# EAGLE board expansion_board_vias_mirrored (EAGLE 7.5.0)
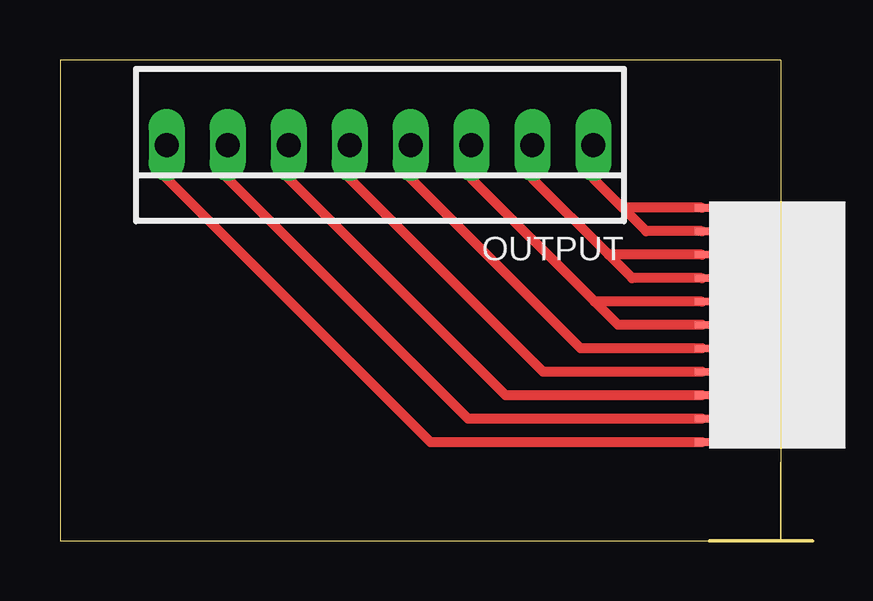
[diagram p0: board, top side]

Size 30.02 x 20.06 mm. Coordinates in mm from the lower left corner, seen from the top.
Outline: 30.02,0 0,0 0,20.06 30.02,20.06 30.02,0
Outline: 30.02,0 30.02,3.3
Copper layers (1*16): Top 0.035mm / dielectric 1.5mm / Bottom 0.035mm
Design rules "default": minimum track width 10mil, minimum drill 24mil, track to track 8mil, track to pad 8mil, pad to pad 8mil, via to via 8mil, smd to smd 8mil, copper to edge 40mil, drill to drill 8mil, minimum pad ring 10mil, minimum via ring 8mil, stop-mask expansion 4mil, vias tented up to drill 0mil, thermal gap 10mil

## Footprints (pad centres in the part's own frame; a part is rotated, then mirrored left to right if it is on the bottom)
22-23-2081 = drill 1 long: 1 -8.89,0; 2 -6.35,0; 3 -3.81,0; 4 -1.27,0; 5 1.27,0; 6 3.81,0; 7 6.35,0; 8 8.89,0
MOLEX52207 = smd 0.61 x 0.305: P$1 0.305,-5.004; P$2 0.305,-4.026; P$3 0.305,-3.048; P$4 0.305,-2.07; P$5 0.305,-1.092; P$6 0.305,-0.114; P$7 0.305,0.864; P$8 0.305,1.841; P$9 0.305,2.819; P$10 0.305,3.797; P$11 0.305,4.775

## Placement (x,y rotation side)
OUTPUT  22-23-2081  [22-23-2081]  13.34,16.51 180 top
U$1  MOLEX52207  [MOLEX52207]  27.05,8.89 180 top

## Library data of the parts
OUTPUT = con-molex; MF: MOLEX; MPN: 22-23-2081; OC_FARNELL: 1756826; OC_NEWARK: 01C7592
U$1 = custom-components

## Nets
N$1: OUTPUT.8 U$1.P$11
N$2: OUTPUT.7 U$1.P$10
N$3: OUTPUT.6 U$1.P$9
N$4: OUTPUT.5 U$1.P$8
N$5: OUTPUT.4 U$1.P$7
N$6: OUTPUT.3 U$1.P$5 U$1.P$6
N$7: OUTPUT.2 U$1.P$3 U$1.P$4
N$8: OUTPUT.1 U$1.P$1 U$1.P$2

## Tracks (layer width: path | path; a pad name or v marks a point on that pad's centre or on a via)
N$1
  Top 0.406: U$1.P$11 15.44,4.11 4.45,15.11 OUTPUT.8
N$2
  Top 0.406: U$1.P$10 17,5.09 6.99,15.11 OUTPUT.7
N$3
  Top 0.406: U$1.P$9 18.57,6.07 9.52,15.11 OUTPUT.6
N$4
  Top 0.406: U$1.P$8 20.13,7.05 12.07,15.11 OUTPUT.5
N$5
  Top 0.406: U$1.P$7 21.69,8.03 14.61,15.11 OUTPUT.4
N$6
  Top 0.406: U$1.P$5 22.28,9.98 | 22.28,9.98 17.14,15.11 OUTPUT.3 | U$1.P$6 23.25,9 22.28,9.98
N$7
  Top 0.406: U$1.P$3 22.86,11.94 | 22.86,11.94 19.68,15.11 OUTPUT.2 | U$1.P$4 23.84,10.96 22.86,11.94
N$8
  Top 0.406: U$1.P$1 23.44,13.89 | 23.44,13.89 23.37,13.97 22.22,15.11 OUTPUT.1 | U$1.P$2 24.42,12.92 23.44,13.89